# Altium PCB 2013_PerfXBee.PcbDoc
Units mil, origin at the board's own origin, x right, y up, seen from the top; angles counter-clockwise.
Board outline 1090 x 1880 mil, 4 copper layers (1-TOP, 2-Signal, 3-GND, 4-BOT); 18 components, 18 nets, 91 pads, 44 vias.
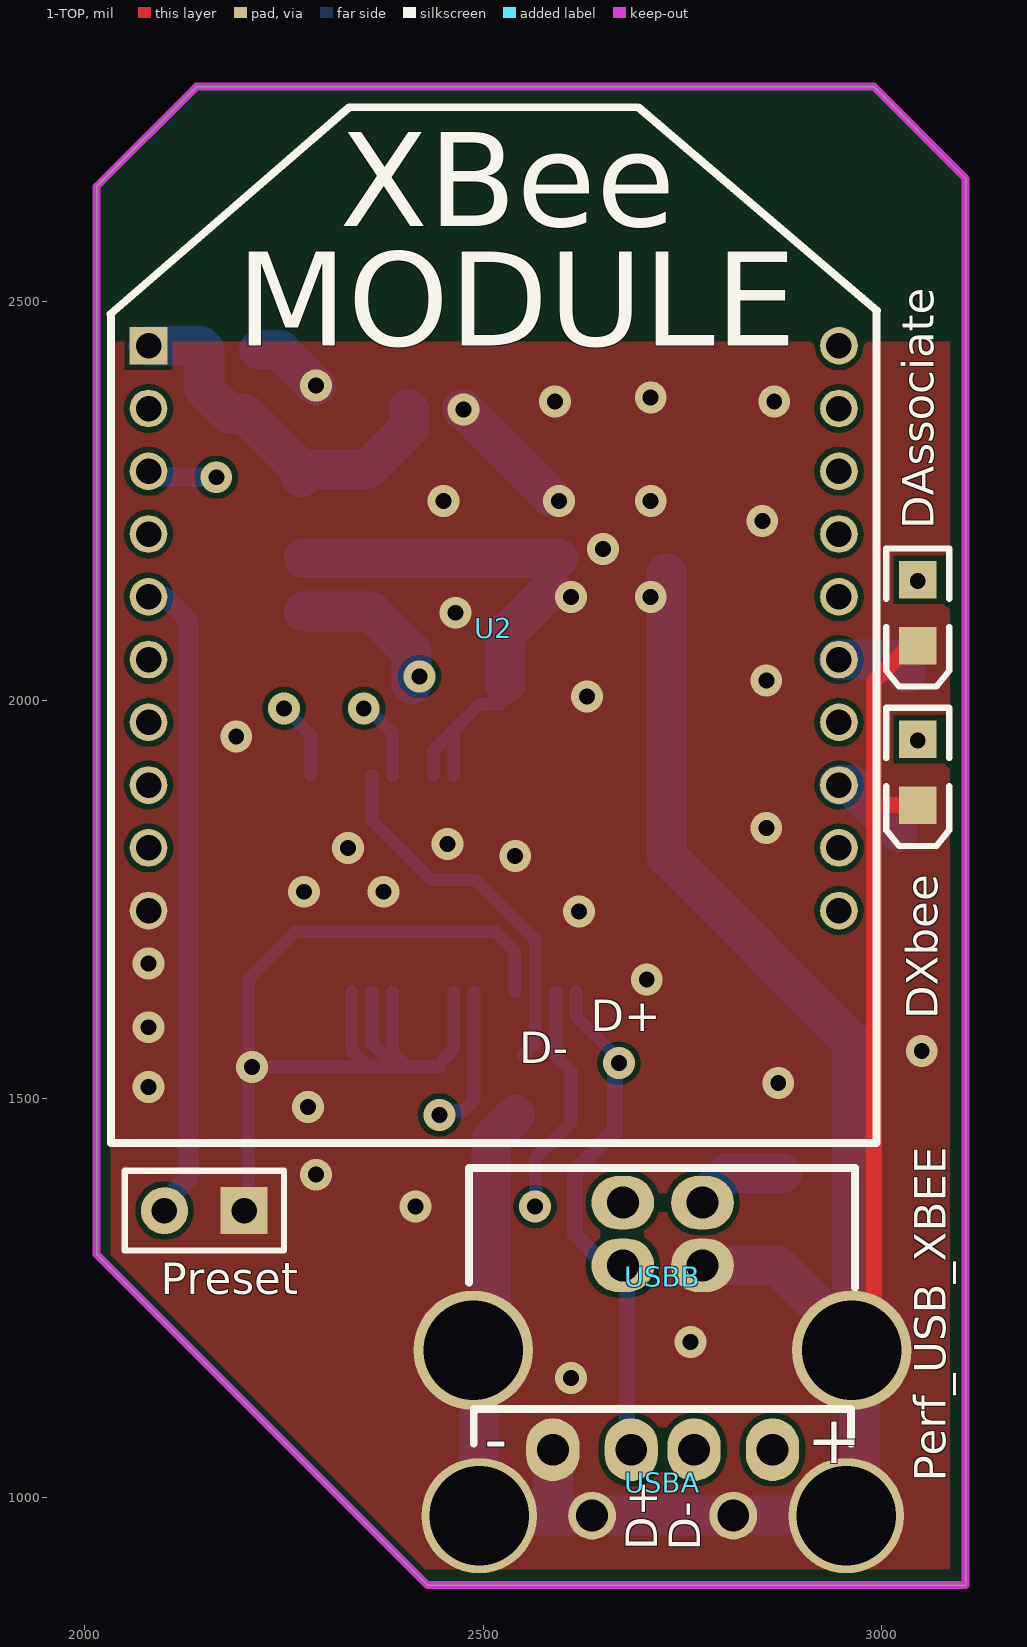
[diagram p0: 1-TOP view]
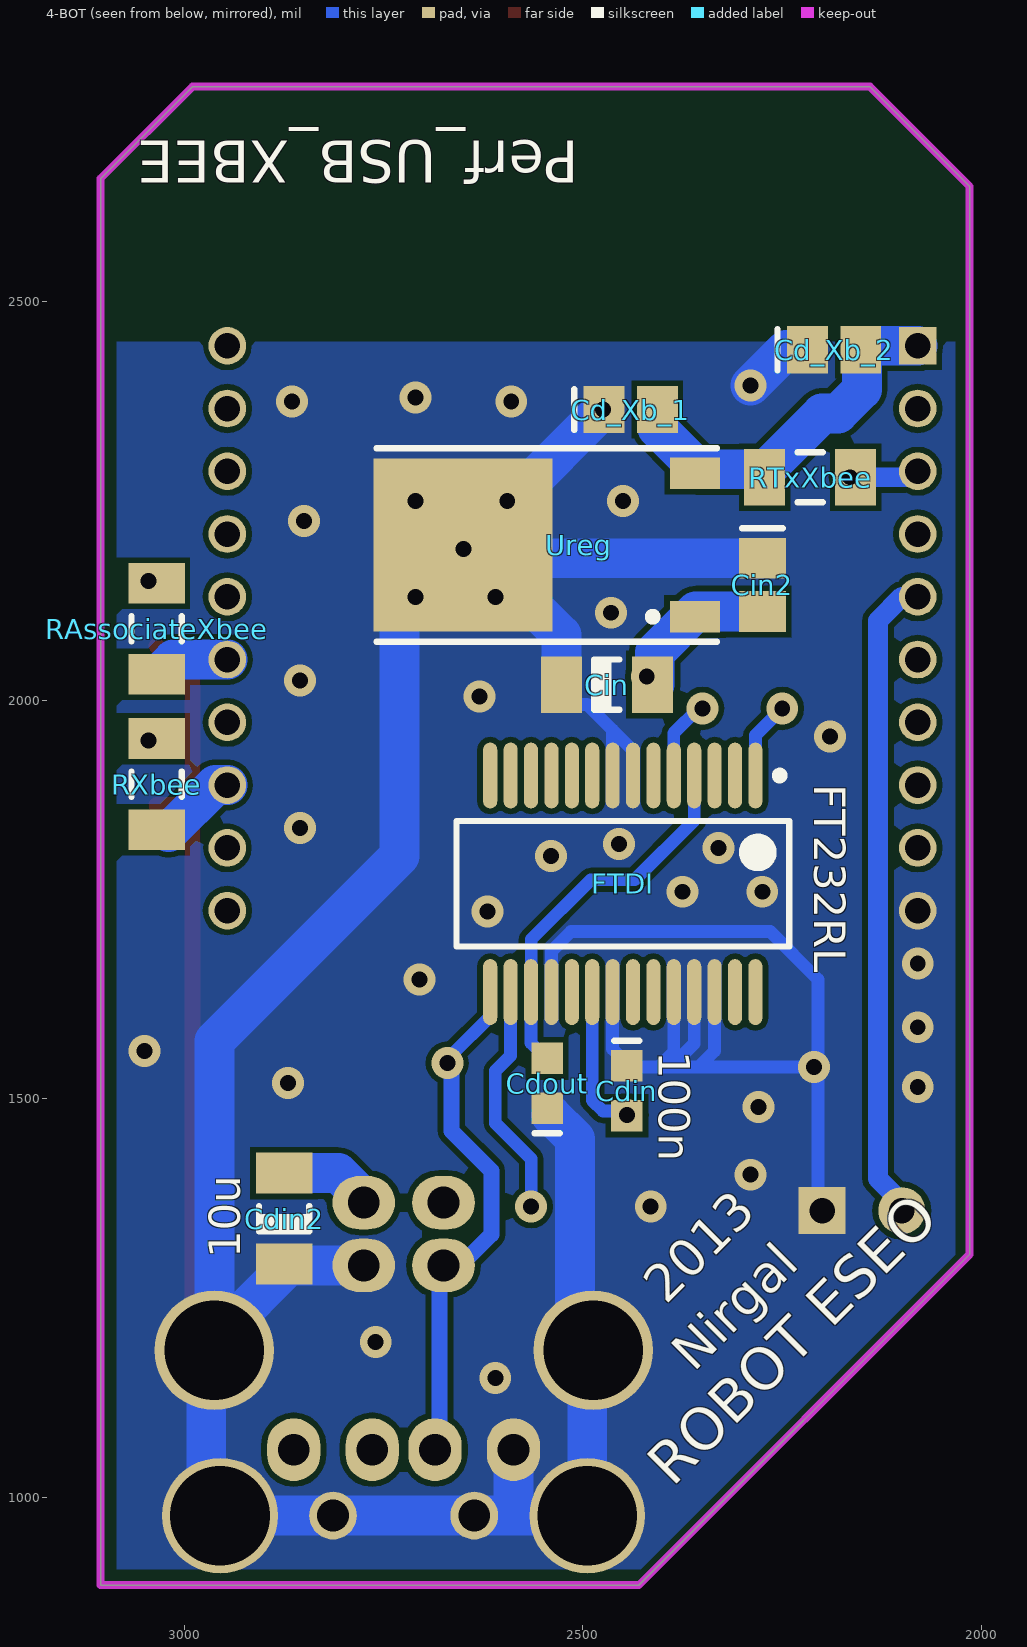
[diagram p1: 4-BOT view, seen from below]
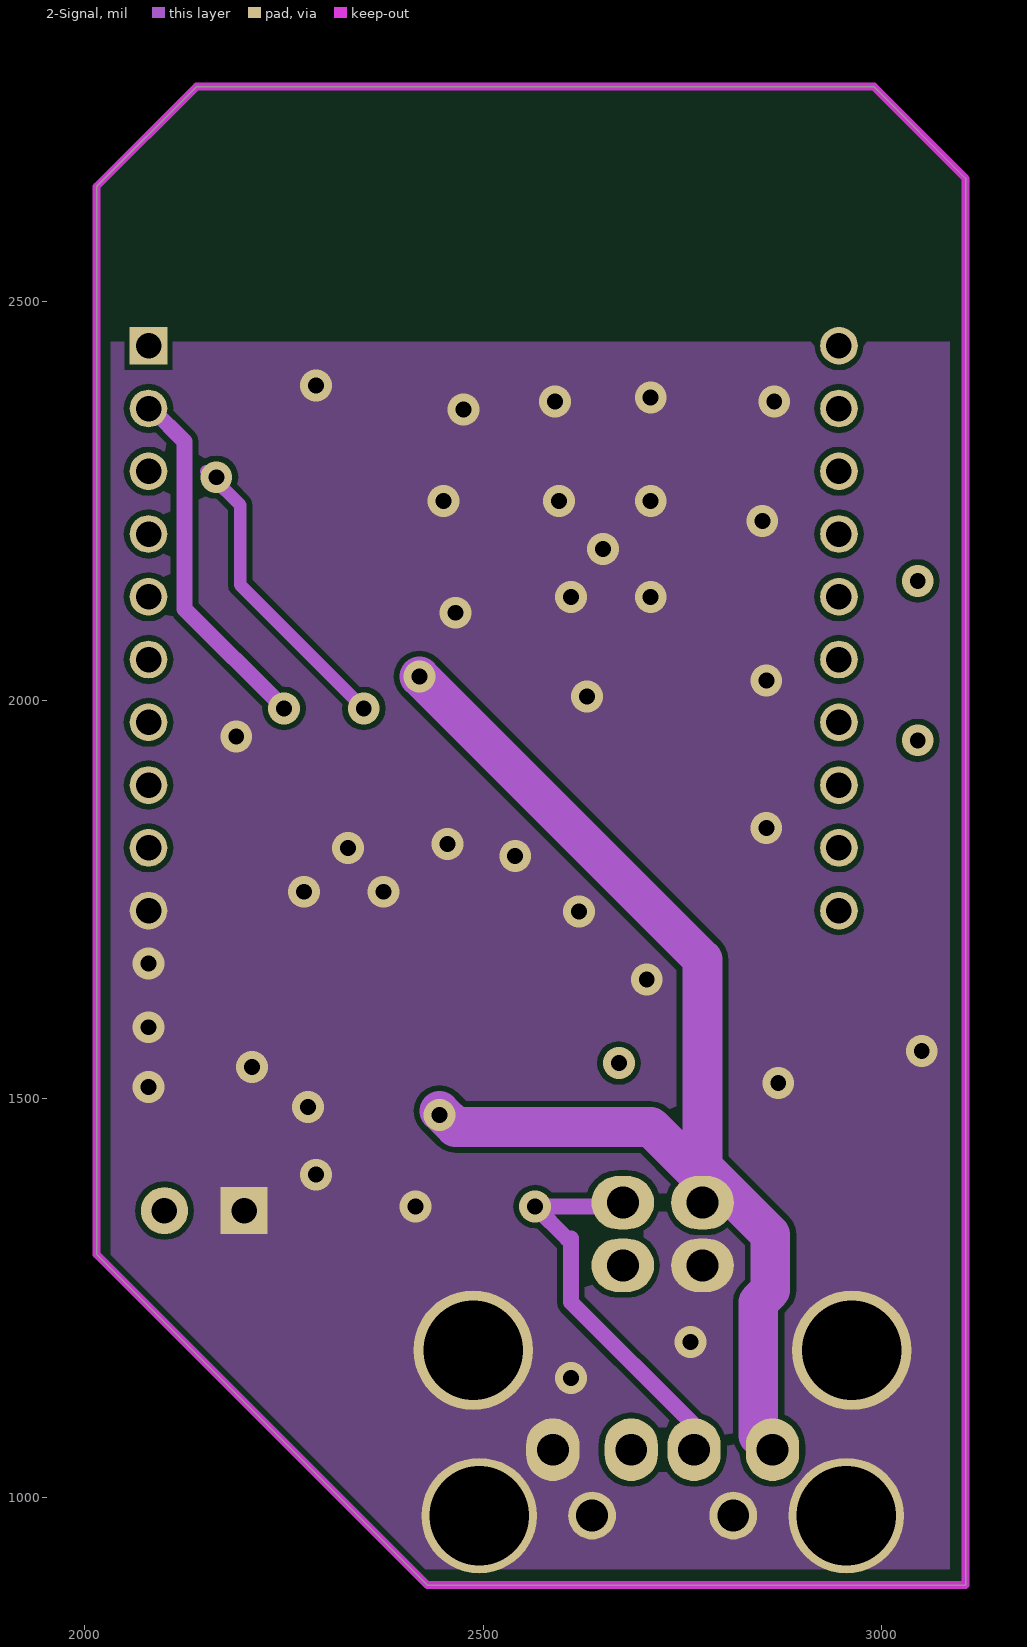
[diagram p2: 2-Signal]
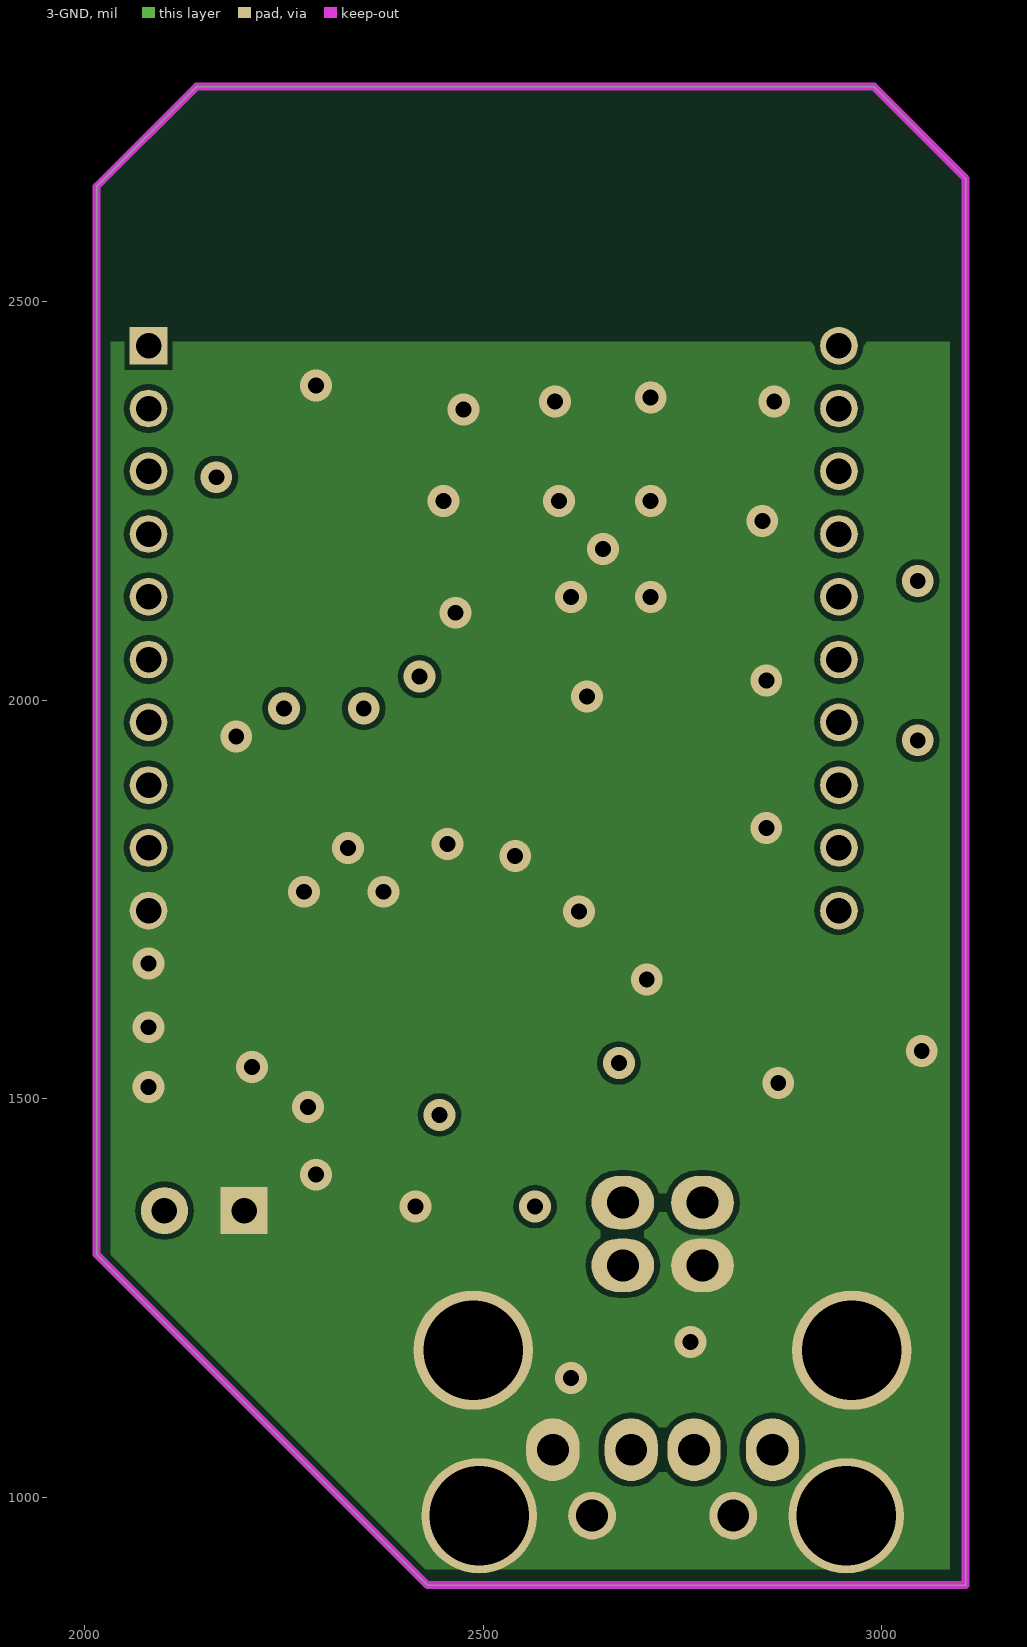
[diagram p3: 3-GND]
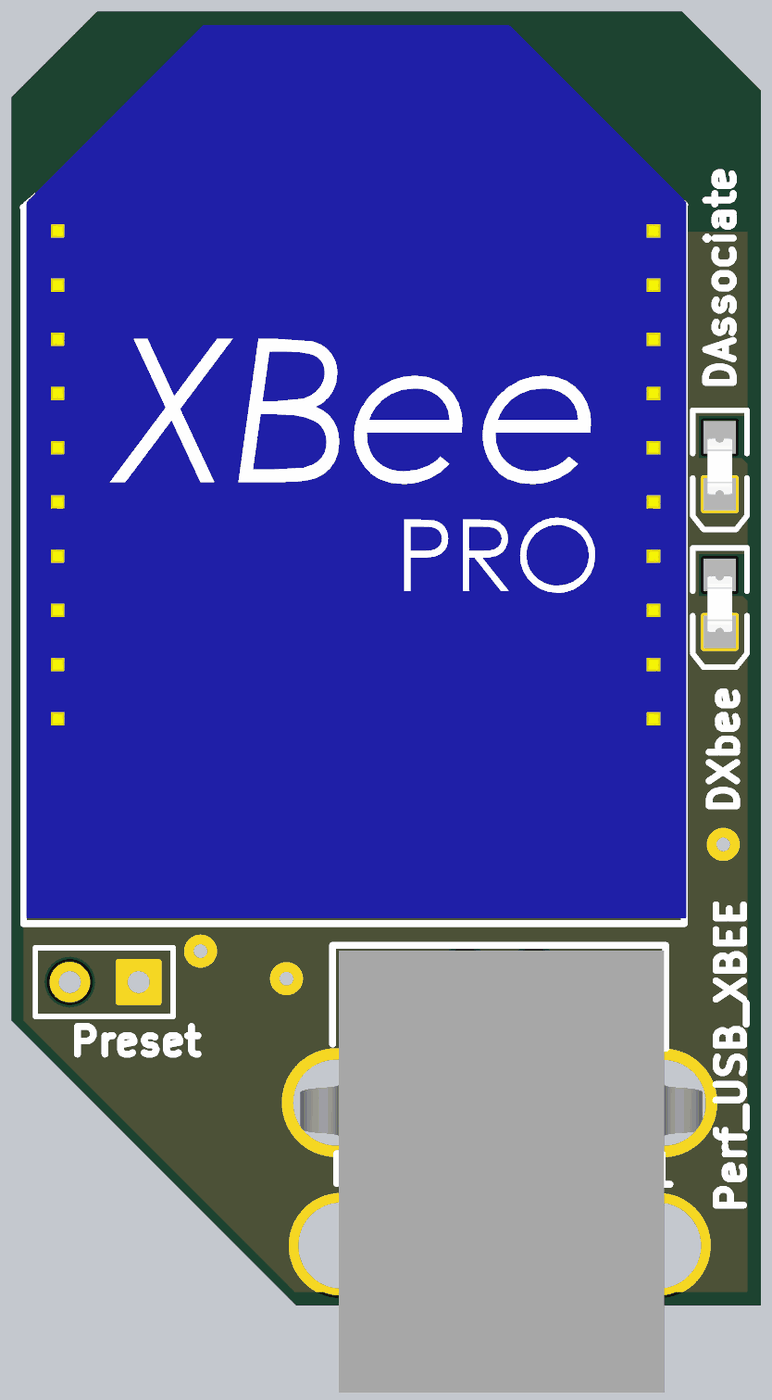
[diagram p4: 3D render of the assembled board from above, using the file's embedded part models]
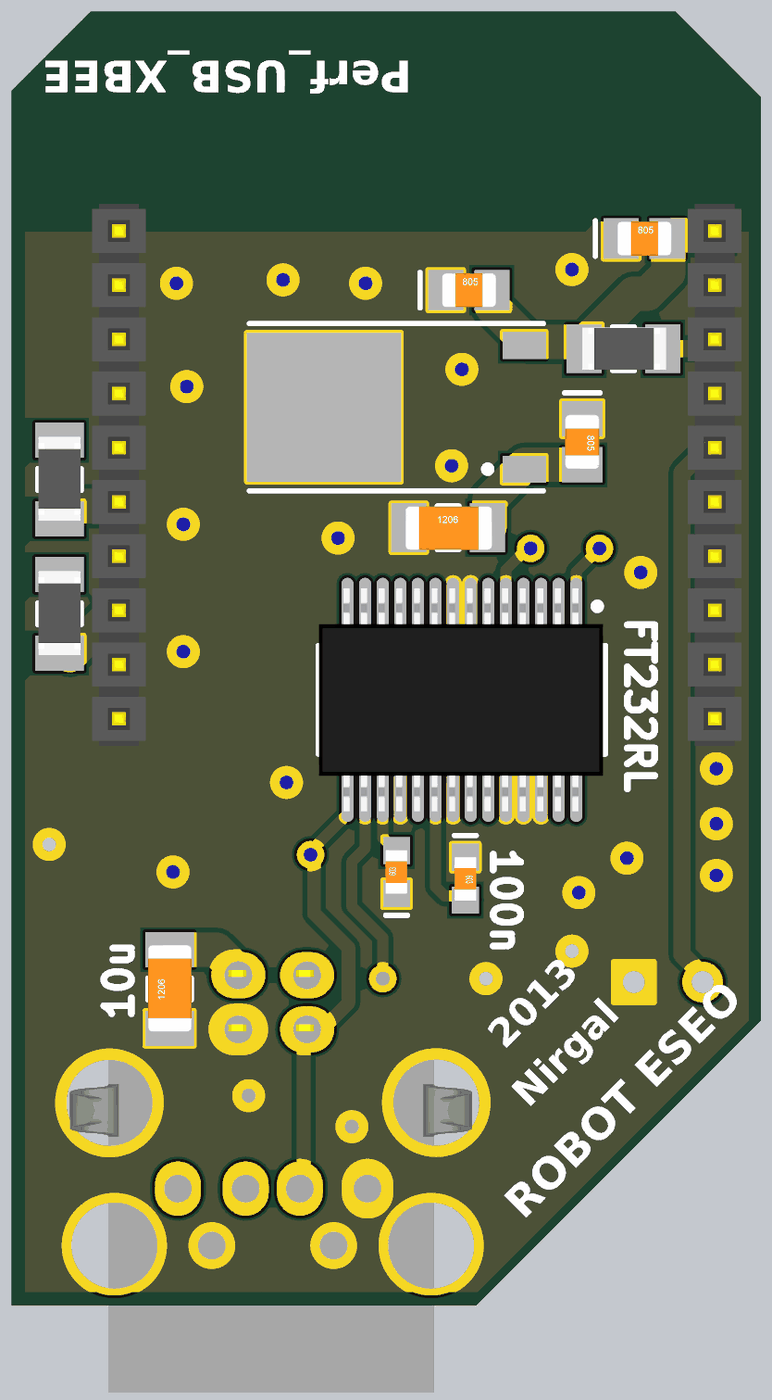
[diagram p5: 3D render of the assembled board from below, using the file's embedded part models]

## Layer stack, top to bottom
1-TOP: signal copper 1.4
Dielectric: core 12.6, FR-4, Dk 4.8
2-Signal: signal copper 1.4
Dielectric: prepreg 12.6, FR-4, Dk 4.8
3-GND: signal copper 1.4
Dielectric: core 12.6, FR-4, Dk 4.8
4-BOT: signal copper 1.4

## Board outline
2015,1305 2430,890 3105,890 3105,2655 2990,2770 2140,2770 2015,2645

## Design rules (kind name [scope] priority, off if disabled: settings)
Clearance [All] p1: gap=7
HoleSize [All] p1: absolutevalues=TRUE maxlimit=200 minlimit=1 maxpercent=80.000 minpercent=20.000
PolygonConnect [All] p1: connectstyle=Direct reliefconductorwidth=10 reliefentries=4 polygonreliefangle="90 Angle"
RoomDefinition 2013_PerfXBee [InComponentClass('2013_PerfXBee')] p1: confinementstyle=ConfineIn formatcopy=TRUE lockcomponents=FALSE outline 495,475 145,475 145,160 495,160
RoutingVias [All] p1: holewidth=28 width=50 viastyle="Through Hole" minholewidth=28 minwidth=50 maxholewidth=28 maxwidth=50
SilkscreenOverComponentPads [All] p1: minsilkscreentomaskgap=10
SolderMaskExpansion [All] p1: expansion=4
Width [All] p1: maxlimit=100 minlimit=12 preferedwidth=16
26 further rules are at their usual default settings.

## Components (designator, comment, footprint, x,y, rotation, side; value= is the part's Value field where it differs from the comment)
Cd_Xb_1 "1uF" C0805_N 2440,2365 r180 bottom
Cd_Xb_2 "10pF" C0805_N 2185,2440 r180 bottom
Cdin "100nF" C0603_N 2445,1510 r270 bottom
Cdin2 "10uF" C1206_N 2875,1350 r90 bottom
Cdout "100nF" C0603_N 2545,1520 r90 bottom
Cin "10uF" C1206_N 2470,2020 r180 bottom
Cin2 "10nF" C0805_N 2275,2145 r270 bottom
DAssociate "LED Jaune" LED_0805 3045,2110 r270 top
DXbee "LED Verte" LED_0805 3045,1910 r270 top
FTDI "IC_FT232RL" SSOP28_N 2450,1770 r270 bottom
Preset "Jump" HDR1X2 2200,1360 r180 top
RAssociateXbee "1k" R1206_N 3035,2090 r90 bottom
RTxXbee "10k" R1206_N 2215,2280 r180 bottom
RXbee "1k" R1206_N 3035,1895 r90 bottom
U2 "XBee" MODULE_XBEE 2080,2445 r0 top
Ureg "1924880" 369A-13 2505,2195 r90 bottom
USBA "USB_A" "USB_A_COUDE - FAR1696544" 2725,1060 r0 top
USBB "USB_B" USB_B_COUDE 2675,1370 r0 top

## Footprints (in the part's own frame and the unit in brackets; to place one, negate y for a bottom-side part, rotate by r counter-clockwise, add the part's x,y. Pads: shape width x height; smd on the part's side, far side on the other; paste and mask are expansions set on the pad)
369A-13 [mm] "D-PAK/TO-252-AA; 3 Leads (1 Cropped); Body 10.3 (inc. leads) x 6.7 mm (LxW max)"
  rect 1x1.6 smd: 1(-2.285,-3.7) 3(2.285,-3.7)
  rect 5.5x5.7 smd: 4(0,3.7)
  silkscreen extent -3.09,-4.4 3.09,6.45
C0603_N [mm] "Chip Capacitor, Body 1.6x0.8mm, IPC Medium Density"
  rect 1x1 smd: 1(-0.8,0) 2(0.787,0)
  silkscreen extent -1.6,-0.4 -1.6,0.4, body extent -0.8,-0.39 0.8,0.41, height 0.32
C0805_N [mm] "Chip Capacitor, Body 2.0x1.3mm, IPC Medium Density"
  rect 1.3x1.5 smd: 1(-0.85,0) 2(0.85,0)
  silkscreen extent -1.8,-0.65 -1.8,0.65, body extent -0.99,-0.63 1.01,0.63, height 0.8
C1206_N [mm] "Chip Capacitor, Body 3.2x1.6mm, IPC Medium Density"
  rect 1.3x1.8 smd: 1(-1.45,0) 2(1.45,0)
  silkscreen extent -0.4,-0.8 0.4,0.8, body extent -1.57,-0.81 1.63,0.79, height 1.02
HDR1X2 [mm] "Connector; Header; 2 Position"
  rect 1.5x1.5 hole 0.813: 1(0,0)
  round 1.5 hole 0.813: 2(2.54,0)
  silkscreen extent -1.27,-1.27 3.81,1.27
LED_0805 [mm] "SM LED; 2 Flat Leads"
  rect 1.2x1.2 smd: 1(-1.05,0) 2(1.05,0)
  silkscreen extent -2.05,-1 2.35,1, body extent -1.05,-0.64 1.06,0.64, height 1.2
MODULE_XBEE [mm] "XBee Series 2 OEM RF Modules"
  rect 1.2x1.2 hole 0.813: 1(0,0)
  round 1.2 hole 0.813: 2(0,-2) 3(0,-4) 4(0,-6) 5(0,-8) 6(0,-10) 7(0,-12) 8(0,-14) 9(0,-16) 10(0,-18) 11(22,-18) 12(22,-16) 13(22,-14) 14(22,-12) 15(22,-10) 16(22,-8) 17(22,-6) 18(22,-4) 19(22,-2) 20(22,0)
  silkscreen extent -1.21,-25.4 23.21,7.6, body extent -1.1,-25.2 23.28,7.74, height 3.1
R1206_N [mm] "Chip Resistor, Body 3.2x1.6mm, IPC Medium Density"
  rect 1.3x1.8 smd: 1(-1.45,0) 2(1.45,0)
  silkscreen extent -0.4,-0.8 0.4,0.8, body extent -1.68,-0.87 1.68,0.87, height 0.71
SSOP28_N [mm] "SOP, 28-Leads, Body 10.2x5.3mm, Pitch 0.65mm, IPC Medium Density"
  oval 2.1x0.45 smd: 1(-3.45,4.225) 2(-3.45,3.575) 3(-3.45,2.925) 4(-3.45,2.275) 5(-3.45,1.625) 6(-3.45,0.975) 7(-3.45,0.325) 8(-3.45,-0.325) 9(-3.45,-0.975) 10(-3.45,-1.625) 11(-3.45,-2.275) 12(-3.45,-2.925) 13(-3.45,-3.575) 14(-3.45,-4.225) 15(3.45,-4.225) 16(3.45,-3.575) 17(3.45,-2.925) 18(3.45,-2.275) 19(3.45,-1.625) 20(3.45,-0.975) 21(3.45,-0.325) 22(3.45,0.325) 23(3.45,0.975) 24(3.45,1.625) 25(3.45,2.275) 26(3.45,2.925) 27(3.45,3.575) 28(3.45,4.225)
  silkscreen extent -3.57,-5.3 2,5.3, body extent -4.11,-5.3 4.11,5.3, height 1.99
"USB_A_COUDE - FAR1696544" [mm]
  oval 1.7x2 hole 1.016: 1(3.5,0) 2(1,0) 3(-1,0) 4(-3.5,0)
  round 3.683 hole 3.175: FIX1(-5.85,-2.1) FIX2(5.85,-2.1)
  round 1.524 hole 1.016: FIX1(-2.25,-2.1) FIX2(2.25,-2.1)
  silkscreen extent -6.02,0.19 5.99,1.29
USB_B_COUDE [mm] "Connector; USB; type B; 4 Position; Pin Spacing=2.54mm/12.07mm"
  oval 2x1.7 hole 1.016: 1(2.54,0) 2(0,0) 3(0,-2) 4(2.54,-2)
  round 3.81 hole 3.175: FIX1(-4.77,-4.7) FIX2(7.3,-4.71)
  silkscreen extent -4.9,-2.7 7.4,1.1, body extent -6.1,-15.39 8.76,0.91, height 10.75

## Part data
Cd_Xb_1 Cd_Xb_2: library part Condensateur, "Capacitor"
Cdin Cdin2 Cdout Cin Cin2: library part Capacitor, "Capacitor"
DAssociate DXbee: library part LED, "Typical LED"
FTDI: "FT232R USB UART"
Preset: library part "Jumper SIP2.54", "Jumper SIP2.54"
RAssociateXbee RTxXbee RXbee: library part Resistor, "Resistor"
Ureg: library part MC7805ACD2T, "Three-Terminal Positive Voltage Regulator"
USBA: library part USB_B, "FAR1696544"

## Via types
v1: diameter 40, hole 20, 1-TOP to 4-BOT, 44 vias

## Nets (pads, with @x,y where several pads share a name; then routed paths per layer and width w, separated by ;. In a path a pad name is that pad's centre, name@x,y a point inside that pad or via, vN(x,y) a via of type N, cw(c..) or ccw(c..) an arc to the next point about the centre after c; other vN are vias at no path point)
3V3: Cd_Xb_1.2 Cd_Xb_2.2 RTxXbee.1 U2.1 Ureg.3 | length 465.7
  4-BOT w50: U2.1 2145,2445 Cd_Xb_2.2@2150,2440 ; Cd_Xb_2.2@2150,2435 2150,2390 2180,2360 2200,2360 2272.09,2287.91 RTxXbee.1 ; RTxXbee.1@2275,2290 2355,2290 2406.54,2341.54 Cd_Xb_1.2
5V: Cdin2.2 Cdin.2 Cin2.2 Cin.2 FTDI.20 Ureg.1 USBA.1 USBB.1 | length 1994.8
  2-Signal w50: v1(2420,2030) 2775,1675 2775,1425 ; v1@2445,1485 2465,1465 2710,1465 2762.5,1412.5 ; 2770,1420 2860,1330 2860,1260 2845,1245 2845,1077.8 USBA.1
  4-BOT w16: Cdin.2@2455,1485 2475,1485 2488.39,1498.39 FTDI.20
  4-BOT w50: Cin2.2 2358.46,2111.54 2410,2060 Cin.2@2410,2020 ; USBB.1@2775,1375 2807.09,1407.09 Cdin2.2
  other v1: 2445,1480
D+: FTDI.15 USBA.3 USBB.3 | length 642
  4-BOT w16: FTDI.15 2616.34,1603.66 v1@2665,1555
  4-BOT w20: v1@2665,1555 2665,1460 2615,1410 2615,1330 2680,1265 USBA.3@2680,1060
  other v1: 2670,1545
D-: FTDI.16 USBA.2 USBB.2 | length 766.3
  2-Signal w20: USBB.2@2650,1365 v1(2565,1365) 2605,1325 2610,1325 2610,1245 2764.37,1090.63 USBA.2
  4-BOT w16: v1@2565,1370 2565,1425 2610,1470 2610,1535 2590.75,1554.25 FTDI.16
GND: Cd_Xb_1.1 Cd_Xb_2.1 Cdin2.1 Cdin.1 Cdout.1 Cin2.1 Cin.1 DAssociate.2 DXbee.2 FTDI.7 FTDI.8 FTDI.18 FTDI.21 FTDI.24 FTDI.25 FTDI.26 Preset.1 U2.10 Ureg.4 USBA.4 USBA.FIX1 USBA.FIX2 USBB.4 USBB.FIX1 USBB.FIX2 | length 5660.6
  1-TOP w20: USBB.FIX2@2990,1200 2990,2023.66 DAssociate.2@3035,2068.66 ; 2998.66,1868.66 DXbee.2@3035,1868.66
  4-BOT w16: Preset.1@2205,1360 v1@2205,1540 ; FTDI.26 2334.84,1560.16 2355,1540 ; FTDI.25 2360.43,1569.57 2390,1540 ; FTDI.24 2386.02,1558.98 2405,1540 ; FTDI.7 2437.2,1937.2 2460,1960 ; Cdin.1@2445,1540 2405,1540 ; Cdin.1@2450,1550 2462.8,1562.8 FTDI.21 ; FTDI.8 2462.8,1962.8 2495,1995 Cin.1@2520,1995 ; FTDI.18 2539.57,1685.43 2515,1710 2265,1710 2205,1650 v1@2205,1540 ; v1@2205,1540 2355,1540 ; 2355,1540 2390,1540 ; 2390,1540 2405,1540
  4-BOT w50: Cd_Xb_2.1 2245,2440 v1(2290,2395) ; Cin2.1 Ureg.4@2593.46,2178.46 ; Cd_Xb_1.1 v1(2475,2365) Ureg.4@2585,2255 ; USBB.FIX1@2490,1215 2510,1235 2510,1450 Cdout.1@2540,1480 ; USBB.FIX1@2494.69,1170.31 2494.69,977.32 2636.42,977.32 2813.58,977.32 2955.32,977.32 2972.68,977.32 USBB.FIX2@2972.68,1157.32 ; Cin.1 2527.09,2082.09 Ureg.4@2585,2140 ; 2587.2,992.2 USBA.4 ; Ureg.4@2730,2160 2730,1805 2962.4,1572.6 USBB.FIX2 ; USBB.4 2868.74,1291.26 USBB.FIX2@2950,1210
  other v1: 2610,1150 2760,1195 2415,1365 2290,1405 2280,1490 2080,1515 2870,1520 2210,1540 3050,1560 2080,1590 2705,1650 2080,1670 2620,1735 2275,1760 2375,1760 2540,1805 2330,1815 2455,1820 2855,1840 2190,1955 2630,2005 2855,2025 2465,2110 2610,2130 2710,2130 2650,2190 2850,2225 2450,2250 2595,2250 2710,2250 2590,2375 2865,2375 2710,2380
LED1: FTDI.23
LED2: FTDI.22
LED3: FTDI.13
LED4: FTDI.14
LED5: FTDI.12
NetCdout_2: Cdout.2 FTDI.4 FTDI.17 | length 468.2
  4-BOT w16: FTDI.4 2360.43,1849.57 2435,1775 2490,1775 2565,1700 FTDI.17@2565,1640 ; Cdout.2@2550,1555 2565.16,1570.16 FTDI.17
NetDAssociate_1: DAssociate.1 RAssociateXbee.2
  other v1: 3045,2150
NetDXbee_1: DXbee.1 RXbee.2
  other v1: 3045,1950
NetPreset_2: Preset.2 U2.5 | length 804.9
  4-BOT w25: U2.5 2099.96,2130.04 2130,2100 2130,1400 Preset.2@2100,1370
NetRAssociateXbee_1: RAssociateXbee.1 U2.15 | length 90.6
  4-BOT w50: U2.15 3013.7,2051.3 RAssociateXbee.1@3030,2035
NetRXbee_1: RXbee.1 U2.13 | length 98.2
  4-BOT w50: U2.13 2961.18,1893.82 RXbee.1@3020,1835
URX: FTDI.1 U2.2 | length 534.4
  2-Signal w20: U2.2@2085,2365 2125,2325 2125,2115 v1(2250,1990)
  4-BOT w16: v1@2255,1985 2283.66,1956.34 FTDI.1
UTX: FTDI.5 RTxXbee.2 U2.3 | length 553.4
  2-Signal w16: v1@2152.5,2287.5 2160,2280 2195,2245 2195,2145 v1(2350,1990)
  4-BOT w16: v1@2355,1990 2386.02,1958.98 FTDI.5
  4-BOT w25: U2.3@2085,2290 2095,2280 RTxXbee.2
  other v1: 2165,2280
pads on no net: FTDI.2 FTDI.3 FTDI.6 FTDI.9 FTDI.10 FTDI.11 FTDI.19 FTDI.27 FTDI.28 U2.4 U2.6 U2.7 U2.8 U2.9 U2.11 U2.12 U2.14 U2.16 U2.17 U2.18 U2.19 U2.20

## Polygon pours and split planes (outlines as drawn)
GND on 4-BOT "4_GND" (solid, pour order 1000): 2032.76,2752.24 3085,2752.24 3085,910 2032.76,910
GND on 3-GND "3_GND" (solid, pour order 1000): 2032.76,2752.24 3085,2752.24 3085,910 2032.76,910
GND on 2-Signal "2_GND" (solid, pour order 1000): 2032.76,2752.24 3085,2752.24 3085,910 2032.76,910
GND on 1-TOP "1_GND" (solid, pour order 1000): 2032.76,2752.24 3085,2752.24 3085,910 2032.76,910

## Keep-outs
Keep-Out Layer:
  the board outline again, w10

## Other copper
1-TOP:
  pour cut-out: 2015,890 2015,1305 2430,890
  pour cut-out: 2000,2800 3125,2800 3125,2450 2000,2450
2-Signal:
  pour cut-out: 2015,890 2015,1305 2430,890
  pour cut-out: 2000,2800 3125,2800 3125,2450 2000,2450
3-GND:
  pour cut-out: 2015,890 2015,1305 2430,890
  pour cut-out: 2000,2800 3125,2800 3125,2450 2000,2450
4-BOT:
  pour cut-out: 2015,890 2015,1305 2430,890
  pour cut-out: 2000,2800 3125,2800 3125,2450 2000,2450

## Silkscreen, mask and mechanical layers (free items; w line width, h text height)
Top Overlay:
  text "D+" at 2635,1585 h40
  text "D-" at 2545,1545 h40
  text "Perf_USB_XBEE" at 3080,1020 h40 r90
Bottom Overlay:
  text "Perf_USB_XBEE" at 2505,2720 h90 r180
  text "FT232RL" at 2210,1895 h40 r90
  text "100n" at 2405,1560 h40 r90
  text "10u" at 2930,1300 h40 r270
  text "2013" at 2385,1230 h80 r315
  text "Nirgal" at 2350,1145 h80 r315
  text "ROBOT ESEO" at 2375,1000 h90 r315

## Text inside footprints (layer, text, board x,y; h text height)
U2: Top Overlay "MODULE" at 2190,2445 h118.11
USBA: Top Overlay "+" at 2906,1043 h60; Top Overlay "-" at 2501,1044 h60; Top Overlay "D-" at 2772,933 h40 r90; Top Overlay "D+" at 2718,934 h40 r90